# Altium PCB BRD140325.pcbdoc
Units mil, origin at the board's own origin, x right, y up, seen from the top; angles counter-clockwise.
Board outline 1633.86 x 787.4 mil, 2 copper layers (Top Layer, Bottom Layer), stack 63.824 mil thick; 17 components, 12 nets, 53 pads, 17 vias.
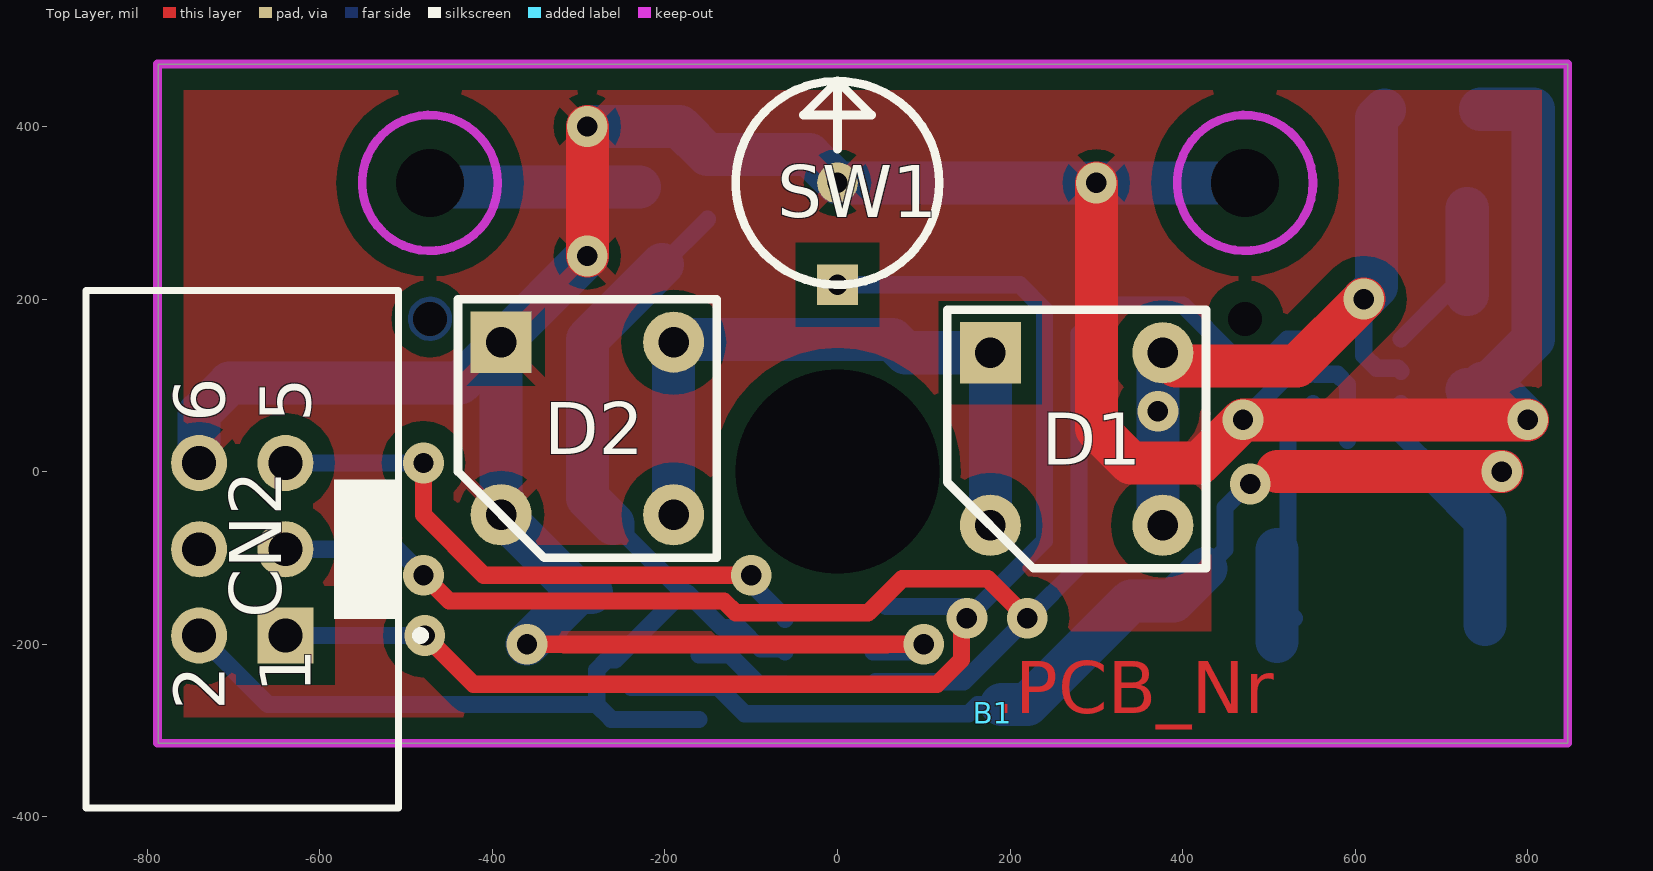
[diagram p0: Top Layer view]
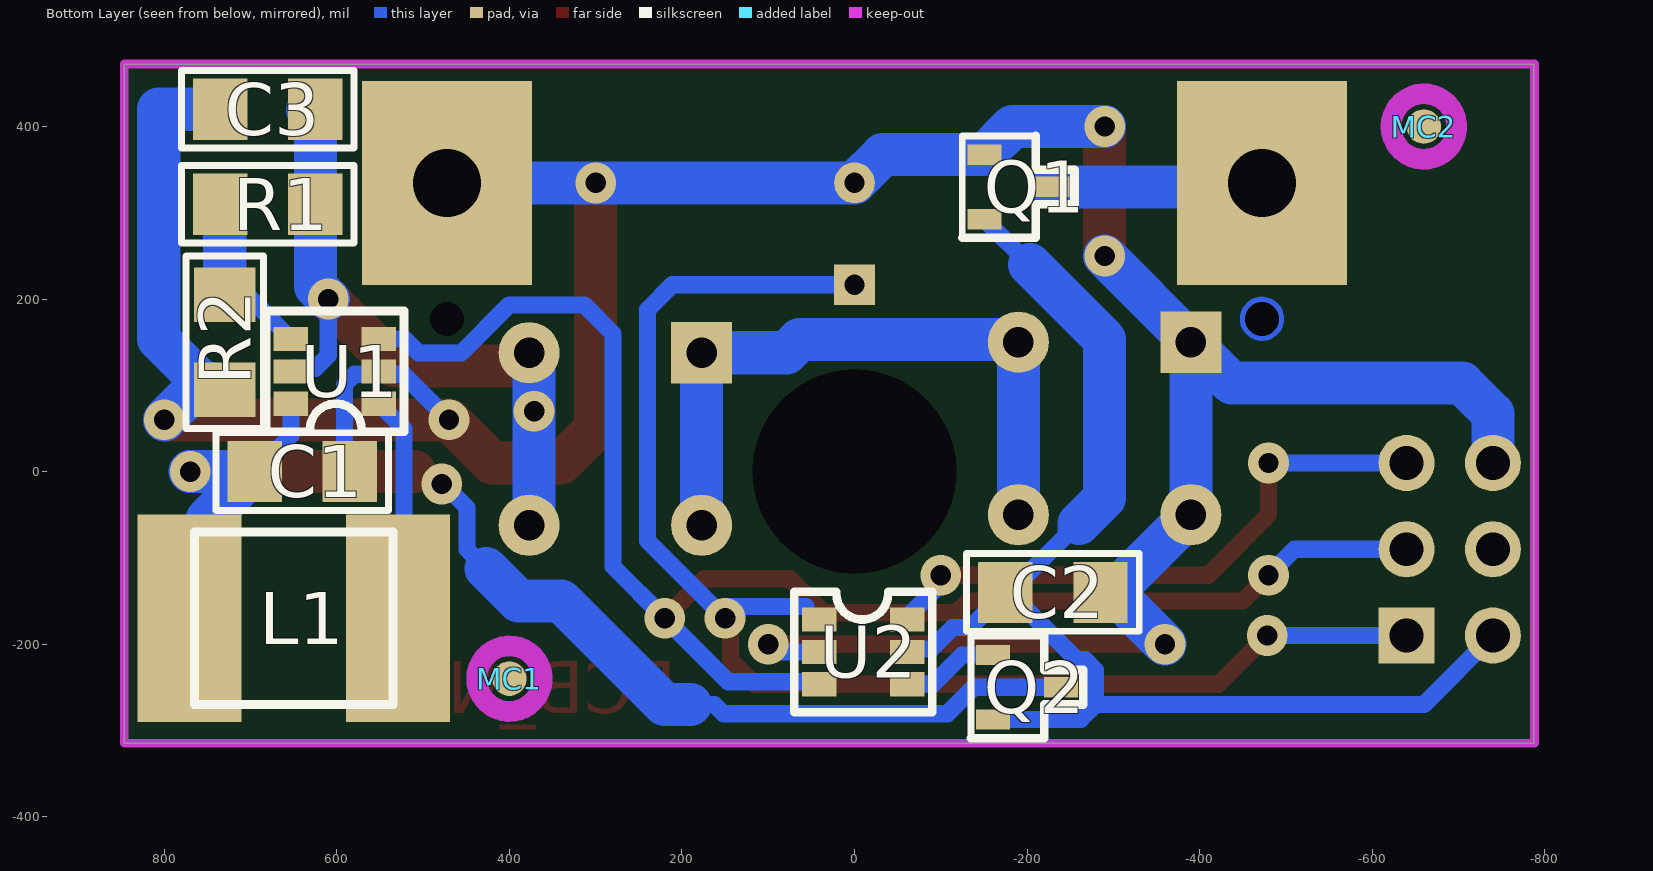
[diagram p1: Bottom Layer view, seen from below]
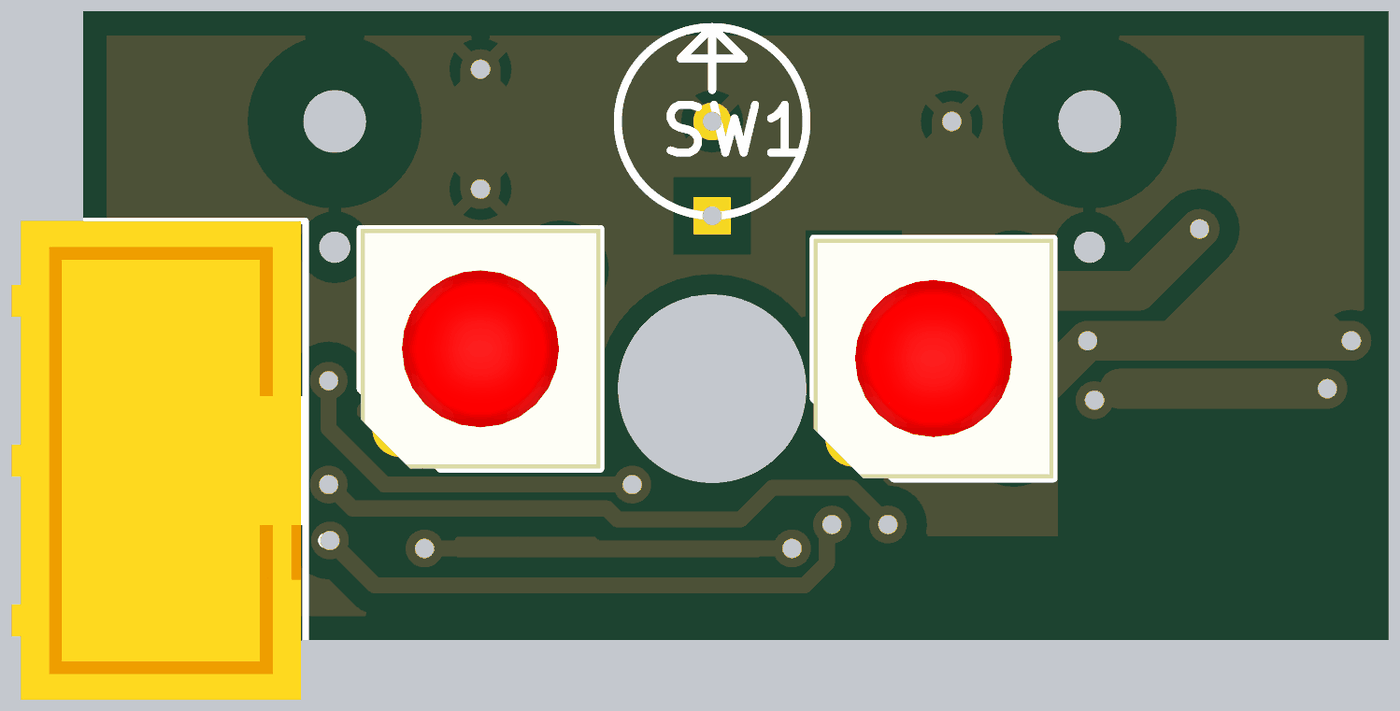
[diagram p2: 3D render of the assembled board from above, using the file's embedded part models]
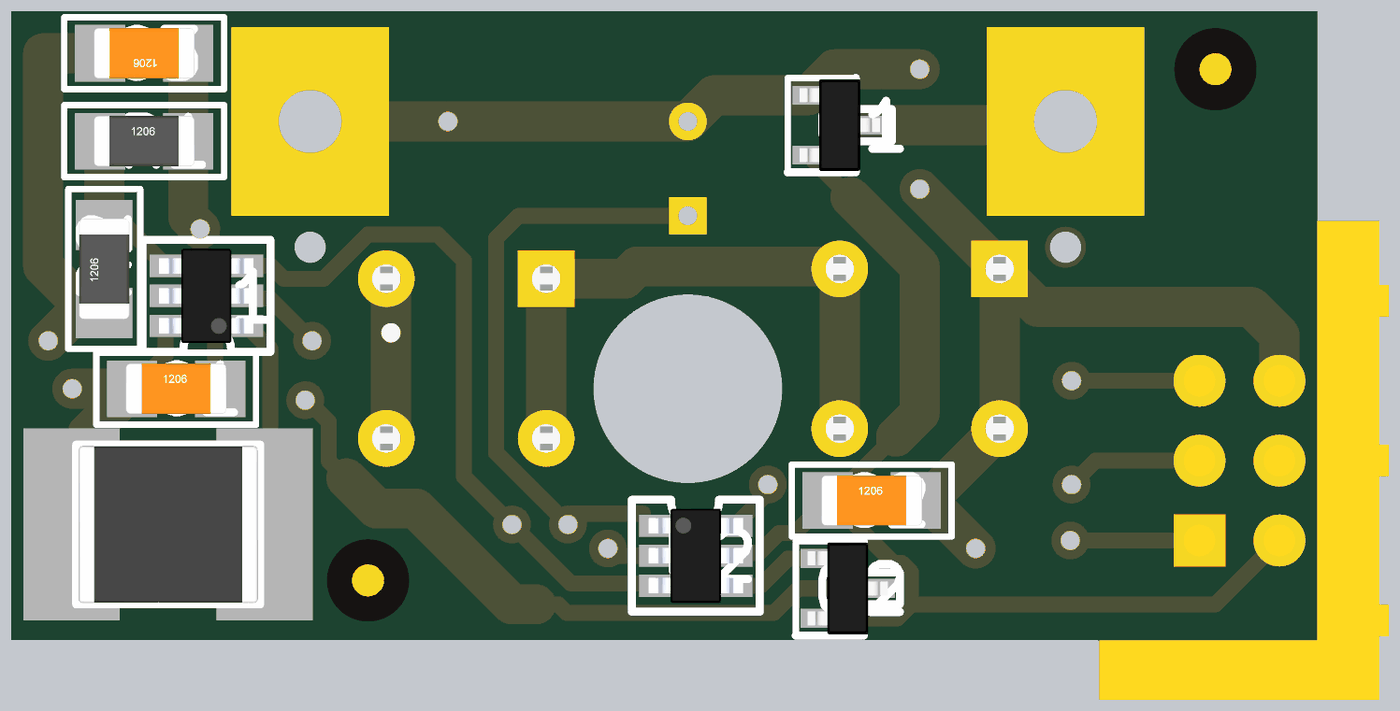
[diagram p3: 3D render of the assembled board from below, using the file's embedded part models]

## Layer stack, top to bottom
Top Layer: signal copper 1.4
Dielectric: core 61.0236, FR-4, Dk 4.8
Bottom Layer: signal copper 1.4

## Board outline
-787.4,-314.96 846.46,-314.96 846.46,472.44 -787.4,472.44

## Design rules (kind name [scope] priority, off if disabled: settings)
Clearance SC_SOT23-6 [HasFootprint('SC_SOT23-6') vs HasFootprint('SC_SOT23-6')] p1: gap=9
Clearance Clearance_polygons [InPolygon] p2: gap=25
Clearance Clearance_All [All] p3: gap=10
HoleSize [All] p1: absolutevalues=TRUE maxlimit=125.98 minlimit=23.62 maxpercent=80.000 minpercent=20.000
MinimumAnnularRing [All] p1: minimumring=10
MinimumSolderMaskSliver SilkscreenOverComponentPads [All] p2: minsoldermaskwidth=10
PlaneClearance [All] p1: clearance=50
PolygonConnect [All] p1: connectstyle=Relief reliefconductorwidth=15 reliefentries=4 polygonreliefangle="45 Angle" airgapwidth=15
RoutingVias [All] p1: holewidth=23.62 width=47.24 viastyle="Through Hole" minholewidth=23.62 minwidth=47.24 maxholewidth=23.62 maxwidth=47.24
SolderMaskExpansion [All] p1: expansion=0
Width [All] p1: maxlimit=50 minlimit=15 preferedwidth=20
26 further rules are at their usual default settings.

## Components (designator, comment, footprint, x,y, rotation, side; value= is the part's Value field where it differs from the comment)
B1 "BRD140325/1" MC_BoardNr 180,-280 r0 top
C1 "YCAM10U" CA_1206 640,0 r180 bottom
C2 "YCAM100N" CA_1206 -230,-140 r180 bottom
C3 "YCAM10U" CA_1206 680,420 r0 bottom
CN2 "0918_506_7324" CN_HARTING_918506X324 -640,-190 r90 top
D1 "HPWT-MD00" DI_HPWT_Mx000-00000 177.17,137.8 r270 top
D2 "HPWT-MD00" DI_HPWT_Mx000-00000 -390,150 r270 top
L1 "4u7/2.7A" CL_STD_2220 650,-170 r180 bottom
MC1 "Fiducial" MC_FIDUCIAL 400,-240 r180 bottom
MC2 "Fiducial" MC_FIDUCIAL -660,400 r180 bottom
Q1 "YTRS2035" SC_SOT23 -190,330 r180 bottom
Q2 "YTRS2035" SC_SOT23 -200,-250 r180 bottom
R1 "YRES47K" RE_1206 680,310 r180 bottom
R2 "YRES15K" RE_1206 730,150 r90 bottom
SW1 "CW1300-1" SW_TILT_Comus_CW1300-1 0,216.54 r0 top
U1 "MCP1640T-I/CHY" SC_SOT23-6 551.18,78.74 r0 bottom
U2 "ATTINY4-TSHR" SC_SOT23-6 41,-171.56 r180 bottom

## Footprints (in the part's own frame and the unit in brackets; to place one, negate y for a bottom-side part, rotate by r counter-clockwise, add the part's x,y. Pads: shape width x height; smd on the part's side, far side on the other; paste and mask are expansions set on the pad)
CA_1206 [mm] "Chip Capacitor; Body 3.2 x 1.6 mm (LxW typ)"
  rect 1.6x1.8 smd: 1(-1.4,0) 2(1.4,0)
  silkscreen extent -2.54,-1.14 2.54,1.14, body extent -1.6,-0.8 1.6,0.8, height 1
CL_STD_2220 [mm]
  rect 3.06x6.1 smd: 1(-3.065,0) 2(3.065,0)
  silkscreen extent -2.92,-2.54 2.92,2.54, body extent -2.85,-2.5 2.85,2.5, height 2.5
CN_HARTING_918506X324 [mm] "Connector; IDC, Low Profile Male Header, Thru-Hole; 6 Position; Vertical; Pitch 2.54 mm; Body 15.24 x 9.2 x 9.45 mm (LxWxH)"
  rect 1.65x1.65 hole 1: 1(0,0)
  round 1.65 hole 1: 2(0,2.54) 3(2.54,0) 4(2.54,2.54) 5(5.08,0) 6(5.08,2.54)
  silkscreen extent -5.08,-4.11 10.16,5.87, body extent -5.08,-3.18 10.16,6.02, height 9.45
DI_HPWT_Mx000-00000 [mm]
  rect 1.8x1.8 hole 0.9: 1(0,0)
  round 1.8 hole 0.9: 2(0,5.08) 3(5.08,0) 4(5.08,5.08)
  silkscreen extent -1.27,-1.27 6.35,6.35, body extent -1.27,-1.27 6.35,6.35, height 6.9
MC_BoardNr [mil] "Board number"
MC_FIDUCIAL [mil] "Fiducial"
  round 40 smd paste-3937.01 mask+31.5: 0(0,0)
  Top Layer keep-out circle w24: c0,0 r38
RE_1206 [mm] "Chip Resistor; Body 3.2 x 1.6 mm (LxW typ)"
  rect 1.6x1.8 smd: 1(-1.4,0) 2(1.4,0)
  silkscreen extent -2.54,-1.14 2.54,1.14, body extent -1.6,-0.8 1.6,0.8, height 1
SC_SOT23 [mm] "SOT23, 3-Leads, Body 2.9x1.3mm, Pitch 0.95mm, Lead Span 2.3mm, IPC High Density"
  rect 1x0.6 smd: 1(-1,0.95) 2(-1,-0.95) 3(1,0)
  silkscreen extent -1.65,-1.5 1.65,1.5, body extent -1.27,-1.46 1.27,1.46, height 0.99
SC_SOT23-6 [mil] "SC_SOT23-6"
  rect 40x28 smd: 1(0,0) 2(0,-37.5) 3(0,-75) 4(102,-75) 5(102,-37.5) 6(102,0)
  silkscreen extent -29,-108 131,32, body extent -8,-97 110,22, height 51
SW_TILT_Comus_CW1300-1 [mm]
  rect 1.2x1.2 hole 0.6: 1(0,0)
  round 1.2 hole 0.6: 2(0,3)
  silkscreen extent -3,0 3,6, body extent -2.98,0.01 3,5.99, height 10

## Part data
B1: library part BARE_PCB
L1: library part LQH55DN4R7M03L
R1 R2: "Resistor"

## Free pads (board coordinates)
  rect 0x0 hole 39.37 unplated: 0(-472.44,177.17) 1(472.44,177.17)
  rect 0x0 hole 236.22 unplated: 0(0,0)
  rect 0x0 / inner rect 0x0 / far side rect 196.85x236.22 hole 78.74 unplated: 1(-472.44,334.65) 2(472.44,334.65)

## Via types
v1: diameter 47.24, hole 23.62, Top Layer to Bottom Layer, tented both sides, 17 vias

## Nets (pads, with @x,y where several pads share a name; then routed paths per layer and width w, separated by ;. In a path a pad name is that pad's centre, name@x,y a point inside that pad or via, vN(x,y) a via of type N, cw(c..) or ccw(c..) an arc to the next point about the centre after c; other vN are vias at no path point)
GND: C1.2 C2.2 C3.2 CN2.6 D2.1 D2.3 pad.2 Q1.1 R2.1 SW1.2 U1.2 U2.2 | length 4012.2
  Top Layer w20: v1(-360,-200) v1(100,-200)
  Top Layer w50: v1(-290,250) v1(-290,400) ; v1(300,334.65) 300,50 340,10 420,10 v1(470,60) v1(800,60)
  Bottom Layer w20: U2.2 96.3,-209.06 100,-212.76 v1(100,-200) ; v1(470,60) 470.16,60 522.9,112.74 547.68,112.74 U1.2 554.68,112.74 579.47,112.74 591.18,101.02 591.18,78.74 591.18,36.06
  Bottom Layer w50: CN2.6 -740,67.07 -704.57,102.51 -437.49,102.51 D2.1 ; v1(-360,-200) C2.2@-300,-140 ; v1(-290,250) D2.1 ; v1(-290,400) -183.23,400 Q1.1 -32.76,367.4 SW1.2 v1(300,334.65) pad.2 ; C2.2 C2.2@-300,-140 ; R2.1 765.12,94.88 v1(800,60) ; C3.2@745.12,420 806.46,420 806.46,153.54 755.28,102.36 R2.1@748.03,102.36 ; D2.1 D2.3 C2.2@-300,-140
NetC1_1: C1.1 L1.1 Q2.3 U1.6 | length 1537.9
  Top Layer w20: v1(478.56,-14.34) 492.9,0 510,0
  Top Layer w50: 510,0 v1(770,0)
  Bottom Layer w20: Q2.3 -138.25,-250 -107.69,-280.56 151.87,-280.56 162.43,-270 190,-270 ; 427.17,-112.2 449.09,-90.28 449.09,-41.64 476.39,-14.34 v1(478.56,-14.34) ; U1.6 653.18,41.94 C1.1
  Bottom Layer w50: 190,-270 220,-270 340,-150 389.37,-150 427.17,-112.2 ; L1.1@750.59,-177.17 750.59,-55.47 C1.1 v1(770,0)
NetC2_1: C2.1 CN2.2 Q1.2 Q2.2 U2.5 | length 1474.2
  Bottom Layer w20: CN2.2 -659.9,-270.1 -279.06,-270.1 ; -245.43,-60 -245.43,-74.11 C2.1@-179.55,-140 ; -203.23,240 Q1.2 ; Q2.2 -262.6,-287.4 -262.6,-286.55 -279.06,-270.1 ; U2.5 -64.5,-205.56 -89.28,-205.56 -114.05,-180.79 -134.09,-180.79 C2.1 C2.1@-179.53,-140 ; -279.06,-270.1 -279.06,-229.9 -267.34,-218.19 -257.72,-218.19 C2.1@-179.53,-140
  Bottom Layer w50: -260.43,-60 -290,-30.43 -290,153.23 -203.23,240
NetC3_1: C3.1 D1.2 D1.4 R1.2 U1.5 | length 821.1
  Top Layer w50: D1.2 392.48,122.48 532.48,122.48 v1(610,200)
  Bottom Layer w20: v1(610,200) 610,134.64 624.9,119.74 649.68,119.74 U1.5
  Bottom Layer w50: D1.4 371.38,-56.42 v1(371.38,70) 371.38,132.01 D1.2 ; v1(610,200) 624.88,214.88 R1.2 624.88,410 C3.1@633.86,418.98
NetCN2_1: CN2.1 SW1.1 U2.1 | length 1617.6
  Top Layer w20: v1(-478.39,-190) -422.01,-246.38 115.31,-246.38 143.62,-218.07 143.62,-166.38 v1@150,-160
  Bottom Layer w20: CN2.1 v1(-478.39,-190) ; SW1.1 211.26,216.54 240,187.8 240,-80 160,-160 150,-160 146.38,-156.38 56.18,-156.38
  other v1: 150,-170
NetCN2_3: CN2.3 U1.3 U2.3 | length 1806.2
  Top Layer w20: v1(-480,-120) -450,-150 -131.69,-150 -118.07,-163.62 35.43,-163.62 74.9,-124.15 174.15,-124.15 v1(220,-170)
  Bottom Layer w20: CN2.3 -510,-90 v1(-480,-120) ; U2.3 43.94,-243.62 146.38,-243.62 v1(220,-170) 280,-110 280,160 313.23,193.23 400.25,193.23 456,137.48 505.14,137.48 521.4,153.74 U1.3
NetCN2_5: CN2.5 U2.6 | length 696.7
  Top Layer w20: v1(-480,10) -480,-50 -410,-120 v1(-100,-120)
  Bottom Layer w20: CN2.5 v1(-480,10) ; v1(-100,-120) -100,-130 -61,-169 U2.6
NetD1_1: D1.1 D1.3 D2.2 D2.4 | length 772.9
  Bottom Layer w50: D2.4 -190,134.09 -193.7,137.8 -178.39,153.11 63.42,153.11 78.74,137.8 D1.1 D1.3
NetL1_2: L1.2 U1.1 | length 370.3
  Bottom Layer w20: L1.2 522.18,-162.85 522.18,49.74 U1.1
  Bottom Layer w50: L1.2@509.25,-196.85 L1.2@509.25,-90.25
NetQ2_1: Q2.1 U2.4 | length 113.7
  Bottom Layer w20: Q2.1 -124.98,-212.6 -91.02,-246.56 U2.4
NetR1_1: R1.1 R2.2 U1.4 | length 183
  Bottom Layer w20: U1.4 R2.2@712.04,212.6
  Bottom Layer w50: R2.2 R1.1@730,304.88
VBAT: pad.1@-472.44,334.65 Q1.3 | length 245
  Bottom Layer w50: pad.1@-472.44,334.65 -467.8,330 Q1.3
pads on no net: CN2.4 MC1.0 MC2.0
copper on no net: | length 395.8
  Top Layer w19.68: 39.37,0 ccw(c0,0) 39.37,0
  Bottom Layer w19.68: -456.69,177.17 ccw(c-472.44,177.17) -456.69,177.17 ; 480.31,177.17 ccw(c472.44,177.17) 480.31,177.17

## Polygon pours and split planes (outlines as drawn)
GND on Top Layer "gndtop" (solid, remove dead copper, pour order 2): -787.4,-314.96 -787.4,472.44 846.46,472.44 846.46,-39.37 433.07,-39.37 433.07,-314.96

## Keep-outs
Top Layer:
  circle w10: c472.44,334.65 r78.74
  circle w10: c-472.44,334.65 r78.74
Keep-Out Layer:
  lines w10: -788.32,-314.96 846.46,-314.96 846.46,472.44 -788.32,472.44 -788.32,-314.96

## Silkscreen, mask and mechanical layers (free items; w line width, h text height)
Mechanical 4:
  lines w5: -3600,-4000 -3800,-4000 ; -2400,1550 -3600,1550 ; -1900,-4000 -1900,-3800 ; -1900,1550 -1900,1750 ; -900,-3499 3600,-3499 ; -900,-3199 3600,-3199 ; -900,-2899 600,-2899 ; 0,-4000 0,-3800 ; 0,1550 0,1750 ; 600,-3799 600,-3199 600,-2599 ; 1900,-4000 1900,-3800 ; 1900,1550 1900,1750 ; 2700,-3799 2700,-3199 ; 3600,-4000 3800,-4000 ; -3800,-4000 3800,-4000 ; -3800,-4000 -3800,1750 3800,1750 3800,-4000 ; -3600,1550 3600,1550 3600,-3800 -3600,-3800 -3600,1550 ; -900,-3799 -900,-2599 ; -900,-3799 3600,-3799 3600,-2599 600,-2599 ; -900,-3799 -2300,-3799 -2300,-2599 -900,-2599 ; -900,-2599 600,-2599 ; -3800,-1125 -3600,-1125 -3800,-1125 ; 3600,-1125 3800,-1125 3600,-1125
  text "A" at 2835,1669 h70 r90
  text "D" at -2815,1619 h70 r270
  text "C" at -940,1619 h70 r270
  text "B" at 860,1619 h70 r270
  text "2" at -3665,344 h70 r90
  text "2" at 3735,344 h70 r90
  text "1" at -3665,-2531 h70 r90
  text "1" at 3735,-2531 h70 r90
  text "ENGINEER:" at -850,-2699 h45
  text "TITLE:" at 650,-2699 h45
  text ".ProjectName" at 900,-2967 h98.43
  text "PCB DESIGNER:" at -850,-2994 h45
  text ".DrawnByX" at -345,-3111 h98.43
  text "DATE:" at -850,-3299 h45
  text "PART NO.:" at 650,-3299 h45
  text "REV:" at 2750,-3299 h45
  text ".PRINT_DATE" at -800,-3419 h70
  text ".RevisionNR" at 2752,-3432 h98.43
  text "FILE NAME:" at -850,-3599 h45
  text "DWG NO:" at 650,-3599 h45
  text "SCALE:" at 2750,-3599 h45
  text ".PCB_Nr" at 1003,-3695 h98.43
  text ".PCB_FILE_NAME_NO_PATH" at -800,-3719 h70
  text "D" at -2933,-3925 h70 r270
  text "C" at -1043,-3925 h70 r270
  text "B" at 867,-3925 h70 r270
  text "A" at 2759,-3925 h70 r270
Mechanical 5:
  lines w5: -3600,-4000 -3800,-4000 ; -3600,-3499 900,-3499 ; -3600,-3199 900,-3199 ; -2700,-3799 -2700,-3199 ; -1900,-4000 -1900,-3800 ; -1900,1550 -1900,1750 ; -600,-3799 -600,-3199 -600,-2599 ; -600,-2899 900,-2899 ; 0,-4000 0,-3800 ; 0,1550 0,1750 ; 1900,-4000 1900,-3800 ; 1900,1550 1900,1750 ; 2400,1550 3600,1550 ; 3600,-4000 3800,-4000 ; -3800,-4000 3800,-4000 ; -3800,-4000 -3800,1750 3800,1750 3800,-4000 ; -600,-2599 -3600,-2599 -3600,-3799 900,-3799 ; -600,-2599 900,-2599 ; 900,-3799 900,-2599 ; 900,-3799 2300,-3799 2300,-2599 900,-2599 ; 3600,1550 -3600,1550 -3600,-3800 3600,-3800 3600,1550 ; -3800,-1125 -3600,-1125 -3800,-1125 ; 3600,-1125 3800,-1125 3600,-1125
  text "A" at -2815,1669 h70 r270
  text "B" at -940,1669 h70 r270
  text "C" at 860,1669 h70 r270
  text "D" at 2760,1669 h70 r270
  text "2" at -3740,344 h70 r270
  text "2" at 3660,344 h70 r270
  text "1" at -3740,-2531 h70 r270
  text "1" at 3660,-2531 h70 r270
  text "TITLE:" at -650,-2699 h45
  text "ENGINEER:" at 850,-2699 h45
  text ".ProjectName" at -865,-2959 h98.43
  text "PCB DESIGNER:" at 850,-2994 h45
  text ".DrawnByX" at 360,-3114 h98.43
  text "REV:" at -2750,-3299 h45
  text "PART NO.:" at -650,-3299 h45
  text "DATE:" at 850,-3299 h45
  text ".PRINT_DATE" at 800,-3419 h70
  text ".RevisionNR" at -2718,-3474 h98.43
  text "SCALE:" at -2750,-3599 h45
  text "DWG NO:" at -650,-3599 h45
  text "FILE NAME:" at 850,-3599 h45
  text ".PCB_FILE_NAME_NO_PATH" at 800,-3719 h70
  text ".PCB_Nr" at -955,-3729 h98.43
  text "B" at -1040,-3881 h70 r270
  text "C" at 860,-3881 h70 r270
  text "D" at 2760,-3881 h70 r270
  text "A" at -2940,-3931 h70 r270
Mechanical 8:
  lines w10: -788.32,-314.96 846.46,-314.96 ; 846.46,-314.96 -787.4,-314.96 -787.4,472.44 846.46,472.44 846.46,-314.96
Drill Drawing:
  lines w8: -3500,-2400 -3500,-2500 -3400,-2500 ; -3500,1400 -3500,1500 -3400,1500 ; 3400,-2500 3500,-2500 3500,-2400 ; 3400,1500 3500,1500 3500,1400
  text ".Legend" at -1122.05,-1732.28 h60

## Dimensions
-787.4,472.44 to -787.4,-314.96 on Mechanical 2
-787.4,472.44 to 846.46,472.44 on Mechanical 2

## Text inside footprints (layer, text, board x,y; h text height)
CN2: Top Overlay "2" at -710.47,-276.6 h59.06 r90; Top Overlay "1" at -610.47,-256.92 h59.06 r90; Top Overlay "6" at -710.47,57.24 h59.06 r90; Top Overlay "5" at -610.47,57.24 h59.06 r90